# Altium PCB isa_svga.PcbDoc (part 1 of 2)
Units mm, origin at the board's own origin, x right, y up, seen from the top; angles counter-clockwise.
Board outline 104.14 x 87.63 mm, 2 copper layers (Front, Back); 62 components, 153 nets, 436 pads, 95 vias.
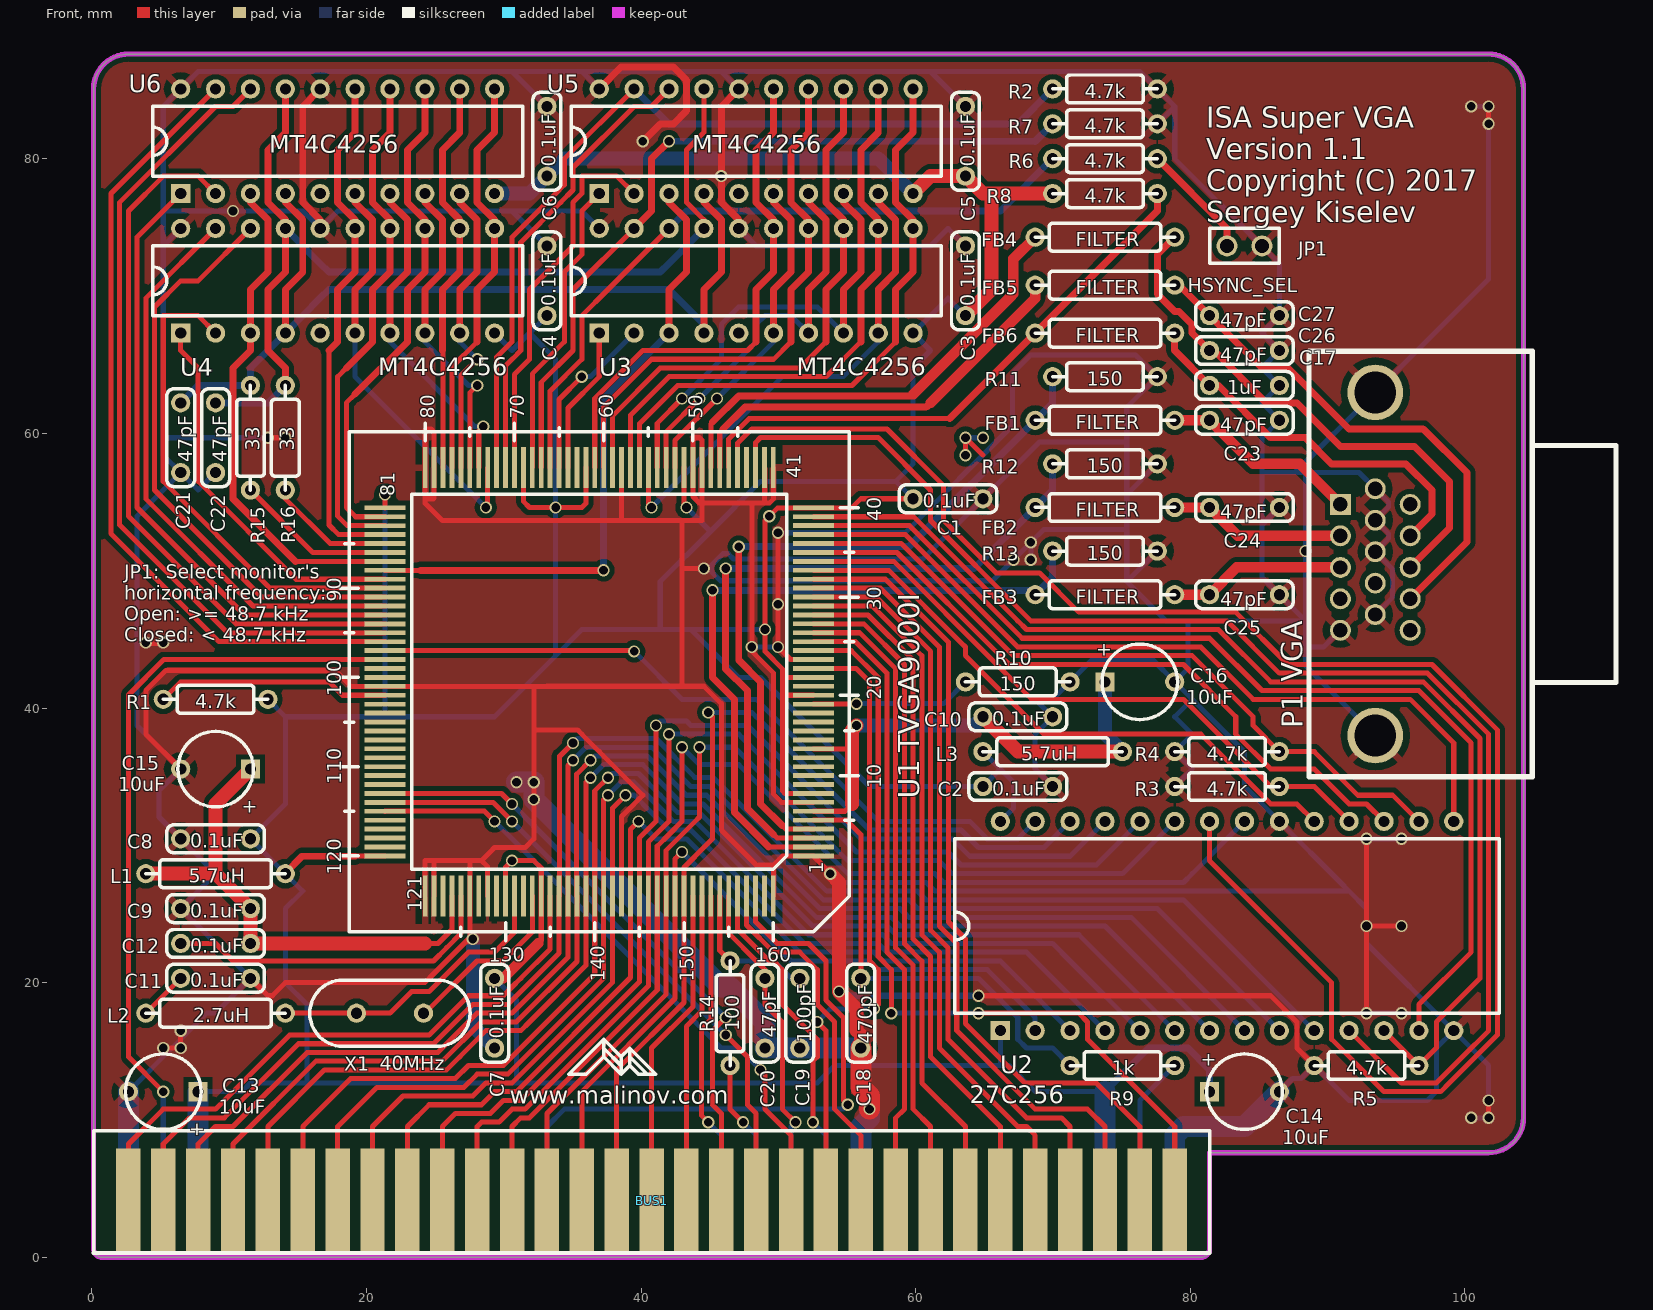
[diagram p0: Front view]
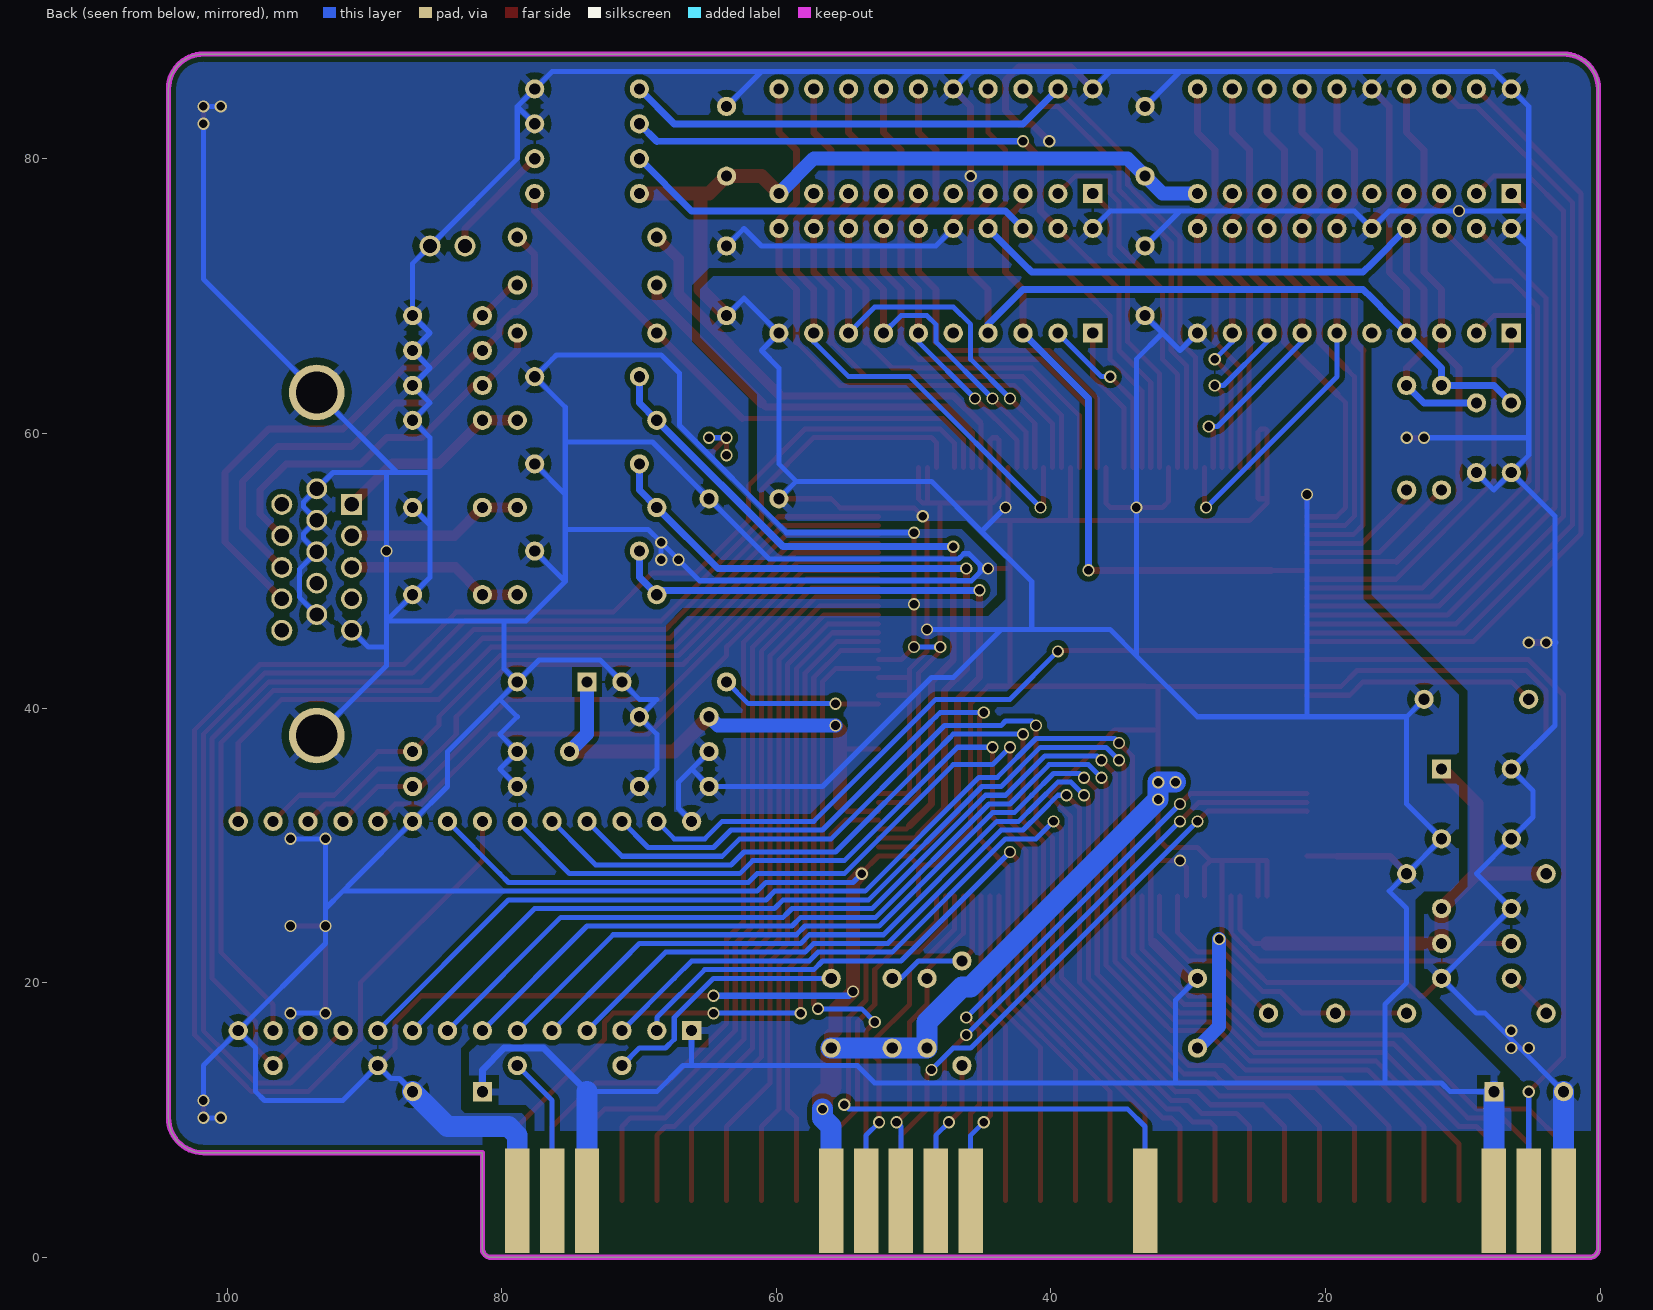
[diagram p1: Back view, seen from below]

## Layer stack, top to bottom
F.Mask: solder mask 0.0102, Solder Resist, Dk 3.5
Front: signal copper 0.0356
Dielectric 1: dielectric 0.32, FR-4, Dk 4.8
Back: signal copper 0.0356
B.Mask: solder mask 0.0102, Solder Resist, Dk 3.5

## Board outline
0.127,0.635 0.127,85.09 cw(c2.667,85.09) 101.727,87.63 cw(c101.727,85.09) 104.267,85.09 104.267,10.16 cw(c101.727,10.16) 101.727,7.62 81.407,7.62 81.407,0.635 cw(c80.772,0.635) 80.772,0 0.762,0 cw(c0.762,0.635) 0.127,0.635

## Design rules (kind name [scope] priority, off if disabled: settings)
Clearance "Clearence 0.37846_Polygon" [InNamedPolygon('Front-GND') OR InNamedPolygon('Back-VCC') OR InNamedPolygon('Back-GND')] p1: gap=0.378 ignorepadtopadclearanceinfootprint=FALSE
Clearance "Clearence 0.254_NetClass" [InNetClass('Default') OR InNetClass('Power')] p2: gap=0.254 ignorepadtopadclearanceinfootprint=FALSE
HoleSize "Hole Size (Default)" [All] p1: absolutevalues=TRUE maxlimit=10 minlimit=0.508 maxpercent=80.000 minpercent=20.000
MinimumSolderMaskSliver [All] p1: minsoldermaskwidth=0
PolygonConnect Polygon_Back-GND_ConnectDirect [IsNamedPolygon('Back-GND') vs IsVia] p1: connectstyle=Direct reliefconductorwidth=0.254 reliefentries=4 polygonreliefangle="90 Angle" airgapwidth=0.254
PolygonConnect Polygon_Back-GND_ConnectRelief45 [IsNamedPolygon('Back-GND') vs (IsThruPin or IsSMTPin) and (PadShape_AllLayers = 'Round')] p2: connectstyle=Relief reliefconductorwidth=0.508 reliefentries=4 polygonreliefangle="45 Angle" airgapwidth=0.508
PolygonConnect Polygon_Back-GND_ConnectRelief90 [IsNamedPolygon('Back-GND') vs (IsThruPin or IsSMTPin) and (PadShape_AllLayers <> 'Round')] p3: connectstyle=Relief reliefconductorwidth=0.508 reliefentries=4 polygonreliefangle="90 Angle" airgapwidth=0.508
PolygonConnect Polygon_Back-VCC_ConnectDirect [IsNamedPolygon('Back-VCC') vs IsVia] p4: connectstyle=Direct reliefconductorwidth=0.254 reliefentries=4 polygonreliefangle="90 Angle" airgapwidth=0.254
PolygonConnect Polygon_Back-VCC_ConnectRelief45 [IsNamedPolygon('Back-VCC') vs (IsThruPin or IsSMTPin) and (PadShape_AllLayers = 'Round')] p5: connectstyle=Relief reliefconductorwidth=0.508 reliefentries=4 polygonreliefangle="45 Angle" airgapwidth=0.508
PolygonConnect Polygon_Back-VCC_ConnectRelief90 [IsNamedPolygon('Back-VCC') vs (IsThruPin or IsSMTPin) and (PadShape_AllLayers <> 'Round')] p6: connectstyle=Relief reliefconductorwidth=0.508 reliefentries=4 polygonreliefangle="90 Angle" airgapwidth=0.508
PolygonConnect Polygon_Front-GND_ConnectDirect [IsNamedPolygon('Front-GND') vs IsVia] p7: connectstyle=Direct reliefconductorwidth=0.254 reliefentries=4 polygonreliefangle="90 Angle" airgapwidth=0.254
PolygonConnect Polygon_Front-GND_ConnectRelief45 [IsNamedPolygon('Front-GND') vs (IsThruPin or IsSMTPin) and (PadShape_AllLayers = 'Round')] p8: connectstyle=Relief reliefconductorwidth=0.508 reliefentries=4 polygonreliefangle="45 Angle" airgapwidth=0.508
PolygonConnect Polygon_Front-GND_ConnectRelief90 [IsNamedPolygon('Front-GND') vs (IsThruPin or IsSMTPin) and (PadShape_AllLayers <> 'Round')] p9: connectstyle=Relief reliefconductorwidth=0.508 reliefentries=4 polygonreliefangle="90 Angle" airgapwidth=0.508
RoutingVias [All] p1: holewidth=0.711 width=1.27 viastyle="Through Hole" minholewidth=0.711 minwidth=1.27 maxholewidth=0.711 maxwidth=1.27
SilkToSilkClearance [All] p1: silktosilkclearance=0
SilkToSolderMaskClearance [IsPad] p1: minsilkscreentomaskgap=0 clearancetoexposedcopper=TRUE
SolderMaskExpansion [All] p1: expansion=0.102 istentingtop=FALSE
Width [All] p1: maxlimit=10 minlimit=0.203 preferedwidth=0.368 minimp=50.000000 maximp=50.000000 favimp=50.000000
26 further rules are at their usual default settings.

## Classes and differential pairs
net class Default: A0 A1 A2 A3 A4 A5 A6 A7 A8 A9 A10 A11 A12 A13 A14 A15 A16 A17 A18 A19 AEN AVDD1 AVDD2 B BLUE C\A\S\ D0 D1 D2 D3 D4 D5 D6 D7 G GND GREEN HSYNC I\O\R\ I\O\W\ IOCHRDY M\E\M\R\ M\E\M\W\ MAA0 MAA1 MAA2 MAA3 MAA4 MAA5 MAA6 MAA7 MAA8 MAB0 MAB1 MAB2 MAB3 MAB4 MAB5 MAB6 MAB7 MAB8 MD0 MD1 MD2 MD3 MD4 MD5 MD6 MD7 MD16 MD17 MD18 MD19 MD20 MD21 MD22 MD23 MONITOR N\M\I\ Net-(C11-Pad1) Net-(C12-Pad2) Net-(C17-Pad1) Net-(C18-Pad1) Net-(C19-Pad1) Net-(C26-Pad1) Net-(C27-Pad1) Net-(JP1-Pad1) Net-(L2-Pad2) Net-(P1-Pad4) Net-(P1-Pad9) Net-(P1-Pad11) Net-(P1-Pad15) Net-(R1-Pad1) Net-(R10-Pad1) Net-(R15-Pad1) Net-(R16-Pad1) Net-(U1-Pad9) Net-(U1-Pad10) Net-(U1-Pad11) Net-(U1-Pad12) Net-(U1-Pad14) Net-(U1-Pad15) Net-(U1-Pad16) Net-(U1-Pad17) Net-(U1-Pad20) Net-(U1-Pad44) Net-(U1-Pad63) Net-(U1-Pad99) Net-(U1-Pad100) Net-(U1-Pad103) Net-(U1-Pad104) Net-(U1-Pad105) Net-(U1-Pad106) Net-(U1-Pad107) Net-(U1-Pad108) Net-(U1-Pad109) Net-(U1-Pad110) Net-(U1-Pad111) Net-(U1-Pad112) Net-(U1-Pad116) Net-(U1-Pad117) Net-(U1-Pad118) Net-(U1-Pad119) Net-(U1-Pad123) Net-(U1-Pad127) Net-(U1-Pad129) Net-(U1-Pad132) Net-(U1-Pad133) Net-(U1-Pad159) Net-(U3-Pad5) Net-(U4-Pad5) Net-(U5-Pad5) Net-(U6-Pad5) OSC R R\A\S\ R\E\F\R\E\S\H\ R\O\M\C\S\ RED RESET RMD0 RMD1 RMD2 RMD3 RMD4 RMD5 RMD6 RMD7 ROMA0 VCC VSYNC W\E\0\ W\E\2\

## Components (designator, comment, footprint, x,y, rotation, side; value= is the part's Value field where it differs from the comment)
BUS1 "BUSPC_DEV" Conn_Bus_ISA8 40.767,4.127 r0 top
C1 "0.1uF" Cap_Cer_504 62.357,55.245 r0 top
C2 "0.1uF" Cap_Cer_504 67.437,34.29 r0 top
C3 "0.1uF" Cap_Cer_504 63.627,71.12 r90 top
C4 "0.1uF" Cap_Cer_504 33.147,71.12 r90 top
C5 "0.1uF" Cap_Cer_504 63.627,81.28 r90 top
C6 "0.1uF" Cap_Cer_504 33.147,81.28 r90 top
C7 "0.1uF" Cap_Cer_504 29.337,17.78 r270 top
C8 "0.1uF" Cap_Cer_504 9.017,30.48 r180 top
C9 "0.1uF" Cap_Cer_504 9.017,25.4 r180 top
C10 "0.1uF" Cap_Cer_504 67.437,39.37 r0 top
C11 "0.1uF" Cap_Cer_504 9.017,20.32 r0 top
C12 "0.1uF" Cap_Cer_504 9.017,22.86 r180 top
C13 "10uF" Cap_Tant_504 5.207,12.065 r180 top
C14 "10uF" Cap_Tant_504 83.947,12.065 r0 top
C15 "10uF" Cap_Tant_504 9.017,35.56 r180 top
C16 "10uF" Cap_Tant_504 76.327,41.91 r0 top
C17 "1uF" Cap_Cer_504 83.947,63.5 r0 top
C18 "470pF" Cap_Cer_504 56.007,17.78 r270 top
C19 "100pF" Cap_Cer_504 51.562,17.78 r270 top
C20 "47pF" Cap_Cer_504 49.022,17.78 r270 top
C21 "47pF" Cap_Cer_504 6.477,59.69 r270 top
C22 "47pF" Cap_Cer_504 9.017,59.69 r270 top
C23 "47pF" Cap_Cer_504 83.947,60.96 r0 top
C24 "47pF" Cap_Cer_504 83.947,54.61 r0 top
C25 "47pF" Cap_Cer_504 83.947,48.26 r0 top
C26 "47pF" Cap_Cer_504 83.947,66.04 r0 top
C27 "47pF" Cap_Cer_504 83.947,68.58 r0 top
FB1 "FILTER" Res_1016 73.787,60.96 r0 top
FB2 "FILTER" Res_1016 73.787,54.61 r0 top
FB3 "FILTER" Res_1016 73.787,48.26 r0 top
FB4 "FILTER" Res_1016 73.787,74.295 r180 top
FB5 "FILTER" Res_1016 73.787,70.802 r180 top
FB6 "FILTER" Res_1016 73.787,67.31 r180 top
JP1 "HSYNC_SEL" Conn_Pin_Header_2x1_Nokey 83.947,73.66 r0 top
L1 "5.7uH" Res_1016 9.017,27.94 r180 top
L2 "2.7uH" Res_1016 9.017,17.78 r0 top
L3 "5.7uH" Res_1016 69.977,36.83 r0 top
P1 "VGA" Conn_Dsub_DE15F 93.472,50.495 r270 top
R1 "4.7k" Res_762 9.017,40.64 r0 top
R2 "4.7k" Res_762 73.787,85.09 r0 top
R3 "4.7k" Res_762 82.677,34.29 r180 top
R4 "4.7k" Res_762 82.677,36.83 r180 top
R5 "4.7k" Res_762 92.837,13.97 r180 top
R6 "4.7k" Res_762 73.787,80.01 r0 top
R7 "4.7k" Res_762 73.787,82.55 r0 top
R8 "4.7k" Res_762 73.787,77.47 r180 top
R9 "1k" Res_762 75.057,13.97 r180 top
R10 "150" Res_762 67.437,41.91 r0 top
R11 "150" Res_762 73.787,64.135 r0 top
R12 "150" Res_762 73.787,57.785 r0 top
R13 "150" Res_762 73.787,51.435 r0 top
R14 "100" Res_762 46.482,17.78 r90 top
R15 "33" Res_762 11.557,59.69 r90 top
R16 "33" Res_762 14.097,59.69 r90 top
U1 "TVGA9000I" PQFP-160 36.957,41.91 r90 top
U2 "27C256" DIP28_600 82.677,24.13 r0 top
U3 "MT4C4256" DIP20_300 48.387,71.12 r0 top
U4 "MT4C4256" DIP20_300 17.907,71.12 r0 top
U5 "MT4C4256" DIP20_300 48.387,81.28 r0 top
U6 "MT4C4256" DIP20_300 17.907,81.28 r0 top
X1 "40MHz" Crystal_HC-49U_Vert 21.717,17.78 r180 top

## Footprints (in the part's own frame and the unit in brackets; to place one, negate y for a bottom-side part, rotate by r counter-clockwise, add the part's x,y. Pads: shape width x height; smd on the part's side, far side on the other; paste and mask are expansions set on the pad)
Cap_Cer_504 [mil]
  round 55 hole 32 paste-55 mask+10: 1(-100,0) 2(100,0)
  silkscreen extent -140,-40 140,40
Cap_Tant_504 [mil]
  rect 55x55 hole 32 paste-55 mask+10: 1(-100,0)
  round 55 hole 32 paste-55 mask+10: 2(100,0)
  silkscreen extent -108,-108 108,108
Conn_Bus_ISA8 [mil]
  rect 70x300 smd far side paste-300 mask+10: 1(1500,0) 2(1400,0) 3(1300,0) 10(600,0) 11(500,0) 12(400,0) 13(300,0) 14(200,0) 19(-300,0) 29(-1300,0) 30(-1400,0) 31(-1500,0)
  rect 70x300 smd paste-300 mask+10: 32(1500,0) 33(1400,0) 34(1300,0) 35(1200,0) 36(1100,0) 37(1000,0) 38(900,0) 39(800,0) 40(700,0) 41(600,0) 42(500,0) 43(400,0) 44(300,0) 45(200,0) 46(100,0) 47(0,0) 48(-100,0) 49(-200,0) 50(-300,0) 51(-400,0) 52(-500,0) 53(-600,0) 54(-700,0) 55(-800,0) 56(-900,0) 57(-1000,0) 58(-1100,0) 59(-1200,0) 60(-1300,0) 61(-1400,0) 62(-1500,0)
  silkscreen extent -1600,-150 1600,200
Conn_Dsub_DE15F [mil]
  rect 60x60 hole 41 paste-60 mask+10: 1(-170.9,-100)
  round 60 hole 41 paste-60 mask+10: 2(-80.7,-100) 3(9.8,-100) 4(100,-100) 5(190.2,-100) 6(-215.6,0) 7(-125.4,0) 8(-35.2,0) 9(54.9,0) 10(145.1,0) 11(-170.9,100) 12(-80.7,100) 13(9.8,100) 14(100,100) 15(190.2,100)
  round 159.4 hole 120.1 paste-159.4 mask+10: Un1(491.9,0) Un2(-491.9,0)
  silkscreen extent -610,-190 610,690
Conn_Pin_Header_2x1_Nokey [mil]
  rrect100% 60x60 hole 40 paste-60 mask+10: 1(-50,0)
  round 60 hole 40 paste-60 mask+10: 2(50,0)
  silkscreen extent -100,-50 100,50
Crystal_HC-49U_Vert [mil]
  round 55 hole 32 paste-55 mask+10: 1(-96.1,0) 2(96.1,0)
  silkscreen extent -230,-95 230,95
DIP20_300 [mil]
  rect 55x55 hole 32 paste-55 mask+10: 1(-450,-150)
  round 55 hole 32 paste-55 mask+10: 2(-350,-150) 3(-250,-150) 4(-150,-150) 5(-50,-150) 6(50,-150) 7(150,-150) 8(250,-150) 9(350,-150) 10(450,-150) 11(450,150) 12(350,150) 13(250,150) 14(150,150) 15(50,150) 16(-50,150) 17(-150,150) 18(-250,150) 19(-350,150) 20(-450,150)
  silkscreen extent -530,-100 530,100
DIP28_600 [mil]
  rect 55x55 hole 32 paste-55 mask+10: 1(-650,-300)
  round 55 hole 32 paste-55 mask+10: 2(-550,-300) 3(-450,-300) 4(-350,-300) 5(-250,-300) 6(-150,-300) 7(-50,-300) 8(50,-300) 9(150,-300) 10(250,-300) 11(350,-300) 12(450,-300) 13(550,-300) 14(650,-300) 15(650,300) 16(550,300) 17(450,300) 18(350,300) 19(250,300) 20(150,300) 21(50,300) 22(-50,300) 23(-150,300) 24(-250,300) 25(-350,300) 26(-450,300) 27(-550,300) 28(-650,300)
  silkscreen extent -780,-250 780,250
PQFP-160 [mil]
  rect 13.8x118.1 smd mask+10: 1(-499,-614.2) 2(-473.4,-614.2) 3(-447.8,-614.2) 4(-422.2,-614.2) 5(-396.6,-614.2) 6(-371,-614.2) 7(-345.4,-614.2) 8(-319.9,-614.2) 9(-294.3,-614.2) 10(-268.7,-614.2) 11(-243.1,-614.2) 12(-217.5,-614.2) 13(-191.9,-614.2) 14(-166.3,-614.2) 15(-140.7,-614.2) 16(-115.1,-614.2) 17(-89.5,-614.2) 18(-63.9,-614.2) 19(-38.4,-614.2) 20(-12.8,-614.2) 21(12.8,-614.2) 22(38.4,-614.2) 23(64,-614.2) 24(89.6,-614.2) 25(115.2,-614.2) 26(140.8,-614.2) 27(166.4,-614.2) 28(192,-614.2) 29(217.5,-614.2) 30(243.1,-614.2) 31(268.7,-614.2) 32(294.3,-614.2) 33(319.9,-614.2) 34(345.5,-614.2) 35(371.1,-614.2) 36(396.7,-614.2) 37(422.3,-614.2) 38(447.9,-614.2) 39(473.5,-614.2) 40(499,-614.2) 81(499,614.2) 82(473.4,614.2) 83(447.8,614.2) 84(422.2,614.2) 85(396.6,614.2) 86(371.1,614.2) 87(345.5,614.2) 88(319.9,614.2) 89(294.3,614.2) 90(268.7,614.2) 91(243.1,614.2) 92(217.5,614.2) 93(191.9,614.2) 94(166.3,614.2) 95(140.7,614.2) 96(115.2,614.2) 97(89.6,614.2) 98(64,614.2) 99(38.4,614.2) 100(12.8,614.2) 101(-12.8,614.2) 102(-38.4,614.2) 103(-64,614.2) 104(-89.6,614.2) 105(-115.2,614.2) 106(-140.8,614.2) 107(-166.3,614.2) 108(-191.9,614.2) 109(-217.5,614.2) 110(-243.1,614.2) 111(-268.7,614.2) 112(-294.3,614.2) 113(-319.9,614.2) 114(-345.5,614.2) 115(-371.1,614.2) 116(-396.7,614.2) 117(-422.2,614.2) 118(-447.8,614.2) 119(-473.4,614.2) 120(-499,614.2)
  rect 118.1x13.8 smd mask+10: 41(614.2,-499) 42(614.2,-473.4) 43(614.2,-447.8) 44(614.2,-422.2) 45(614.2,-396.7) 46(614.2,-371.1) 47(614.2,-345.5) 48(614.2,-319.9) 49(614.2,-294.3) 50(614.2,-268.7) 51(614.2,-243.1) 52(614.2,-217.5) 53(614.2,-191.9) 54(614.2,-166.3) 55(614.2,-140.8) 56(614.2,-115.2) 57(614.2,-89.6) 58(614.2,-64) 59(614.2,-38.4) 60(614.2,-12.8) 61(614.2,12.8) 62(614.2,38.4) 63(614.2,64) 64(614.2,89.6) 65(614.2,115.2) 66(614.2,140.8) 67(614.2,166.3) 68(614.2,191.9) 69(614.2,217.5) 70(614.2,243.1) 71(614.2,268.7) 72(614.2,294.3) 73(614.2,319.9) 74(614.2,345.5) 75(614.2,371.1) 76(614.2,396.7) 77(614.2,422.2) 78(614.2,447.8) 79(614.2,473.4) 80(614.2,499) 121(-614.2,499) 122(-614.2,473.4) 123(-614.2,447.8) 124(-614.2,422.2) 125(-614.2,396.7) 126(-614.2,371.1) 127(-614.2,345.5) 128(-614.2,319.9) 129(-614.2,294.3) 130(-614.2,268.7) 131(-614.2,243.1) 132(-614.2,217.5) 133(-614.2,191.9) 134(-614.2,166.3) 135(-614.2,140.8) 136(-614.2,115.2) 137(-614.2,89.6) 138(-614.2,64) 139(-614.2,38.4) 140(-614.2,12.8) 141(-614.2,-12.8) 142(-614.2,-38.4) 143(-614.2,-64) 144(-614.2,-89.6) 145(-614.2,-115.2) 146(-614.2,-140.7) 147(-614.2,-166.3) 148(-614.2,-191.9) 149(-614.2,-217.5) 150(-614.2,-243.1) 151(-614.2,-268.7) 152(-614.2,-294.3) 153(-614.2,-319.9) 154(-614.2,-345.5) 155(-614.2,-371.1) 156(-614.2,-396.6) 157(-614.2,-422.2) 158(-614.2,-447.8) 159(-614.2,-473.4) 160(-614.2,-499)
  silkscreen extent -742,-742 742,742
Res_762 [mil]
  round 55 hole 32 paste-55 mask+10: 1(-150,0) 2(150,0)
  silkscreen extent -150,-40 150,40
Res_1016 [mil]
  round 55 hole 32 paste-55 mask+10: 1(-200,0) 2(200,0)
  silkscreen extent -200,-40 200,40

## Part data
BUS1: library part Conn_Bus_ISA8, "ISA8 PCB edge connector"
C1 C2 C3 C4 C5 C6 C7 C8 C9 C10 C11 C12 C17 C18 C19 C20 C21 C22 C23 C24 C25 C26 C27: library part Cap_Cer_504, "Ceramic Capacitor 5.04mm"
C13 C14 C15 C16: library part Cap_Tant_504, "Tantalum Capacitor - 5.04mm"
FB1 FB2 FB3 FB4 FB5 FB6 L1 L2 L3: library part Res_1016, "Resistor 10.16mm between leads"
JP1: library part Conn_Pin_Header_2x1_Nokey, "Connector Pin Header 2x1 No Key"
P1: library part Conn_Dsub_DE15F, "Connector DE15 Female Right Angle Through Hole"
R1 R2 R3 R4 R5 R6 R7 R8 R9 R10 R11 R12 R13 R14 R15 R16: library part Res_762, "Resitance 3 pas"
U1: library part PQFP-160
U2: library part DIP28_600, "Module Dil 28 pins, pads ronds, e=600 mils"
U3 U4 U5 U6: library part DIP20_300, "20 pins DIL package, round pads"
X1: library part Crystal_HC-49U_Vert, "Quartz Crystal HC-49U Vertical"

## Via types
v1: diameter 0.889, hole 0.635, Front to Back, tented both sides, 95 vias

## Nets (pads, with @x,y where several pads share a name; then routed paths per layer and width w, separated by ;. In a path a pad name is that pad's centre, name@x,y a point inside that pad or via, vN(x,y) a via of type N, cw(c..) or ccw(c..) an arc to the next point about the centre after c; other vN are vias at no path point)
A0: BUS1.62 U1.135 | length 44.6
  Front w0.368: BUS1.62@2.667,4.127 2.667,8.255 5.207,10.795 9.017,10.795 14.414,16.192 23.939,16.192 24.575,16.192 27.432,19.05 29.972,19.05 30.607,19.685 31.242,20.32 33.381,22.459 33.381,24.447 U1.135@33.381,26.309
A1: BUS1.61 U1.136 U2.10 | length 120.2
  Front w0.368: BUS1.61@5.207,4.127 5.207,8.255 7.112,10.16 9.652,10.16 15.05,15.557 24.257,15.557 24.892,15.557 27.749,18.415 29.972,18.415 29.972,18.42 30.295,18.42 31.242,19.367 31.877,20.002 34.031,22.156 U1.136@34.031,26.309 ; 34.031,23.49 34.031,23.495 U1.136@34.031,26.309 ; v1(35.052,37.465) 34.099,36.512 34.051,36.512 34.051,34.242 34.051,26.309 U1.136@34.031,26.309
  Back w0.368: v1(35.052,37.465) 35.369,37.782 41.084,37.782 43.912,34.955 45.245,34.955 53.53,26.67 53.721,26.67 59.187,26.67 ; U2.10@89.027,16.51 79.502,26.035 60.759,26.035 60.759,26.03 60.134,26.655 60.134,26.665 60.134,26.67 59.187,26.67 ; 59.187,26.67 59.187,26.675 59.187,26.67
A2: BUS1.60 U1.137 U2.9 | length 111.9
  Front w0.368: BUS1.60@7.747,4.127 7.747,8.255 9.017,9.525 10.287,9.525 15.684,14.922 23.939,14.922 25.204,14.922 28.062,17.78 ; v1(35.052,36.195) 34.681,35.824 34.681,35.242 34.681,33.919 U1.137@34.681,26.309 34.681,24.447 34.681,21.854 30.607,17.78 28.062,17.78 ; 28.062,17.78 28.062,17.785 28.062,17.78
  Back w0.368: v1(35.052,36.195) 35.999,37.142 40.767,37.142 40.772,37.142 43.624,34.29 45.021,34.29 53.276,26.035 58.547,26.035 ; 77.607,25.395 77.602,25.4 77.597,25.4 ; U2.9@86.487,16.51 86.487,16.515 77.597,25.405 77.597,25.4 ; 58.547,26.035 58.864,26.035 ; 58.547,26.035 59.499,26.035 60.134,25.4 77.597,25.4 ; 58.864,26.035 58.864,26.03 58.864,26.035
A3: BUS1.59 U1.138 U2.8 | length 105.8
  Front w0.368: BUS1.59@10.287,4.127 10.287,8.255 10.287,8.26 16.317,14.29 25.53,14.29 28.384,17.145 29.019,17.145 29.019,17.15 30.93,17.15 35.331,21.552 35.331,21.907 35.331,22.86 U1.138@35.331,26.309 35.311,26.309 35.311,33.597 35.311,34.608 35.311,35.184 v1(36.322,36.195)
  Back w0.368: v1(36.322,36.195) 36.639,36.512 40.45,36.512 43.307,33.655 44.767,33.655 44.831,33.591 53.023,25.4 58.547,25.4 58.864,25.4 59.182,25.082 59.499,24.765 75.692,24.765 U2.8@83.947,16.51
A4: BUS1.58 U1.139 U2.7 | length 100.7
  Front w0.368: BUS1.58@12.827,4.127 12.827,9.525 16.954,13.652 25.845,13.652 26.797,14.605 28.702,16.51 31.242,16.51 31.877,17.145 35.982,21.25 35.982,21.907 U1.139@35.982,26.309 36.002,26.309 36.002,33.02 36.002,33.972 36.002,34.605 v1(36.322,34.925)
  Back w0.368: v1(36.322,34.925) 37.274,35.877 40.132,35.877 41.719,34.29 42.989,33.02 44.514,33.02 52.768,24.765 58.229,24.765 58.229,24.76 58.859,24.13 73.787,24.13 U2.7@81.407,16.51
A5: BUS1.57 U1.140 U2.6 | length 95.1
  Front w0.368: BUS1.57@15.367,4.127 15.367,9.525 18.86,13.018 26.479,13.018 27.432,13.97 29.972,13.97 36.632,20.63 36.632,22.225 U1.140@36.632,26.309 36.632,32.385 36.632,33.972 36.639,33.972 v1(37.592,34.925)
  Back w0.368: v1(37.592,34.925) 37.91,35.242 39.814,35.242 41.402,33.655 42.672,32.385 44.259,32.385 52.514,24.13 53.149,24.13 57.912,24.13 58.547,23.495 71.882,23.495 U2.6@78.867,16.51
A6: BUS1.56 U1.141 U2.5 | length 90
  Front w0.368: BUS1.56@17.907,4.127 17.907,9.525 20.764,12.383 27.114,12.383 28.067,13.335 28.067,13.34 30.295,13.34 37.282,20.328 U1.141@37.282,26.309 37.282,31.75 ; 37.282,32.393 37.282,32.385 37.282,31.75 ; v1(37.592,33.655) 37.282,33.345 37.282,33.337 37.282,31.75
  Back w0.368: v1(37.592,33.655) 38.544,34.608 39.497,34.608 41.084,33.02 42.355,31.75 43.942,31.75 52.197,23.495 52.832,23.495 53.467,23.495 57.594,23.495 58.229,22.86 69.977,22.86 71.247,21.59 U2.5@76.327,16.51
A7: BUS1.55 U1.142 U2.4 | length 83.3
  Front w0.368: BUS1.55@20.447,4.127 20.447,9.525 22.669,11.747 27.749,11.747 28.702,12.7 28.702,12.71 30.617,12.71 37.932,20.025 37.932,20.637 37.932,21.273 U1.142@37.932,26.309 37.932,31.75 37.932,32.067 ; 37.932,32.09 37.932,32.067 ; 37.932,32.408 37.932,32.385 ; v1(38.862,33.655) 37.932,32.725 37.932,32.385 ; 37.932,32.067 37.932,32.385
  Back w0.368: v1(38.862,33.655) 39.497,33.655 40.767,32.385 42.037,31.115 43.624,31.115 51.88,22.86 52.514,22.86 52.832,22.86 57.277,22.86 57.277,22.855 57.907,22.225 68.072,22.225 69.342,20.955 U2.4@73.787,16.51
A8: BUS1.54 U1.144 U2.3 | length 75.5
  Front w0.368: BUS1.54@22.987,4.127 22.987,9.525 24.575,11.112 28.384,11.112 29.337,12.065 30.924,12.065 ; v1(39.814,31.75) 39.233,31.168 39.233,29.21 U1.144@39.233,26.309 39.233,20.955 39.233,20.373 30.924,12.065 ; 30.924,12.065 30.924,12.06 30.924,12.065
  Back w0.368: v1(39.814,31.75) 41.084,30.48 43.307,30.48 51.562,22.225 52.197,22.225 56.959,22.225 57.594,21.59 66.167,21.59 67.437,20.32 U2.3@71.247,16.51
A9: BUS1.53 U1.145 U2.25 | length 81.2
  Front w0.368: BUS1.53@25.527,4.127 25.527,9.525 26.479,10.477 29.019,10.477 29.972,11.43 31.242,11.43 39.814,20.002 39.883,20.071 U1.145@39.883,26.309 39.883,28.892 39.883,30.549 41.084,31.75 41.084,38.1 41.084,38.417 v1(41.084,38.735)
  Back w0.368: v1(41.084,38.735) 41.402,39.052 43.307,39.052 43.624,38.735 47.752,38.735 48.704,37.782 56.007,30.48 62.674,30.48 63.944,29.21 71.247,29.21 71.882,29.845 U2.25@73.787,31.75
A10: BUS1.52 U1.146 U2.24 | length 80.6
  Front w0.368: BUS1.52@28.067,4.127 28.067,9.525 28.384,9.842 29.654,9.842 30.612,10.8 31.565,10.8 40.531,19.766 40.531,20.002 U1.146@40.531,26.309 40.531,29.845 40.531,30.244 42.037,31.75 42.037,37.465 v1(42.037,38.1)
  Back w0.368: v1(42.037,38.1) 47.117,38.1 47.434,37.782 48.387,36.83 55.689,29.527 62.357,29.527 63.309,28.575 73.152,28.575 73.787,29.21 U2.24@76.327,31.75
A11: BUS1.51 U1.147 U2.21 | length 85.4
  Front w0.368: BUS1.51@30.607,4.127 30.607,9.525 31.242,10.16 31.877,10.16 41.181,19.464 41.181,20.32 41.181,20.637 U1.147@41.181,26.309 41.181,29.845 41.181,29.942 42.037,30.797 42.989,31.75 v1(42.989,37.148)
  Back w0.368: v1(42.989,37.148) 44.259,35.877 47.117,35.877 55.054,27.94 59.817,27.94 61.404,27.94 62.039,27.305 79.502,27.305 80.137,27.94 U2.21@83.947,31.75
A12: BUS1.50 U1.148 U2.23 | length 77.6
  Front w0.368: BUS1.50@33.147,4.127 33.147,8.89 33.147,10.477 41.831,19.162 41.831,21.273 U1.148@41.831,26.309 41.831,28.575 41.831,29.21 41.831,29.639 42.672,30.48 43.942,31.75 44.259,32.067 v1(44.259,37.148)
  Back w0.368: v1(44.259,37.148) 46.799,37.148 55.054,28.892 61.722,28.892 62.674,27.94 62.992,27.94 75.057,27.94 U2.23@78.867,31.75
A13: BUS1.49 U1.149 U2.2 | length 60.1
  Front w0.368: BUS1.49@35.687,4.127 35.687,9.525 35.687,12.065 42.481,18.86 42.481,20.32 U1.149@42.481,26.309 42.481,29.019 42.672,29.21 v1(42.989,29.527)
  Back w0.368: v1(42.989,29.527) 50.927,21.59 56.642,21.59 57.277,20.955 65.215,20.955 68.707,17.462 U2.2@68.707,16.51
A14: BUS1.48 U1.150 U2.26 | length 69.8
  Front w0.368: BUS1.48@38.227,4.127 38.227,9.525 38.227,10.795 38.227,13.652 43.132,18.557 43.132,19.367 U1.150@43.132,26.309 43.132,28.4 43.307,28.575 44.577,29.845 45.212,30.48 45.212,39.37 v1(44.895,39.688)
  Back w0.368: v1(44.895,39.688) 48.069,39.688 48.387,39.37 49.022,38.735 56.642,31.115 63.309,31.115 64.579,29.845 69.342,29.845 U2.26@71.247,31.75
A15: BUS1.47 U1.151 | length 23.4
  Front w0.368: BUS1.47@40.767,4.127 40.767,15.24 43.782,18.255 43.782,20.637 U1.151@43.782,26.309
A16: BUS1.46 U1.152 | length 22.6
  Front w0.368: BUS1.46@43.307,4.127 43.307,9.525 43.307,10.16 43.307,13.335 43.307,16.828 44.432,17.953 U1.152@44.432,26.309
A17: BUS1.45 U1.113 | length 45.6
  Front w0.368: U1.113@21.356,33.785 29.842,33.785 v1(30.607,33.02) ; BUS1.45@45.847,4.127 45.847,10.477 45.212,11.112 45.212,16.51 v1(46.164,17.462)
  Back w0.368: v1(30.607,33.02) v1(46.164,17.462)
A18: BUS1.44 U1.114 | length 44.8
  Front w0.368: U1.114@21.356,33.134 29.223,33.134 v1(30.607,31.75) ; v1(46.164,16.192) 47.752,14.605 47.752,11.112 48.387,10.477 BUS1.44@48.387,4.127
  Back w0.368: v1(30.607,31.75) v1(46.164,16.192)
A19: BUS1.43 U1.115 | length 47
  Front w0.368: v1(29.337,31.75) 28.583,32.504 U1.115@21.356,32.504 ; v1(48.704,13.652) 49.022,13.335 49.022,10.795 50.927,8.89 BUS1.43@50.927,4.127 ; U1.115@21.356,32.504 U1.115@21.356,32.484 U1.115@21.356,32.504
  Back w0.368: v1(29.337,31.75) 45.847,15.24 47.117,15.24 ; 48.069,14.287 47.117,15.24 ; v1(48.704,13.652) 47.117,15.24
AEN: BUS1.42 U1.22 | length 46.8
  Front w0.368: U1.22@52.558,42.885 54.419,42.885 ; v1(52.832,17.145) 53.467,16.51 53.467,16.192 BUS1.42@53.467,4.127 ; 54.714,42.885 54.419,42.885 ; v1(56.959,18.098) 57.277,18.415 57.277,20.955 56.642,21.59 56.642,41.91 55.667,42.885 54.737,42.885 54.419,42.885
  Back w0.368: v1(52.832,17.145) 53.785,18.098 v1(56.959,18.098)
AVDD1: C9.1 C12.1 C15.1 L1.2 U1.124 | length 48.6
  Front w0.368: L1.2@3.937,27.94 9.017,27.94 ; 9.017,33.02 C15.1@11.557,35.56 ; C12.1@11.557,22.86 C9.1@11.557,25.4 ; 24.257,22.86 25.209,22.86 26.233,23.884 U1.124@26.233,26.309
  Front w1.016: L1.2@3.937,27.94 9.017,27.94 ; C15.1@11.557,35.56 9.017,33.02 9.017,27.94 ; 24.257,22.86 C12.1@11.557,22.86 C9.1@11.557,25.4 9.017,27.94
AVDD2: C10.1 C16.1 L3.2 U1.6 U1.13 | length 45.5
  Front w0.368: U1.6@52.558,32.487 54.839,32.487 55.372,33.02 55.372,33.655 55.372,33.972 ; U1.13@52.558,37.036 55.26,37.036 55.372,37.148 ; 55.372,34.29 55.372,33.972 ; 55.372,38.417 55.372,37.148 ; 55.372,33.972 55.372,37.148
  Front w1.016: 55.372,33.02 55.372,38.417 v1(55.689,38.735) ; C10.1@64.897,39.37 67.437,36.83 L3.2@75.057,36.83
  Back w0.368: 73.787,38.1 L3.2@75.057,36.83
  Back w1.016: v1(55.689,38.735) 64.262,38.735 C10.1@64.897,39.37 ; C16.1@73.787,41.91 73.787,38.1 L3.2@75.057,36.83
B: FB3.1 R13.1 U1.2 | length 51
  Front w0.368: 49.299,29.886 50.292,29.886 U1.2@52.558,29.886
  Front w0.505: 45.212,42.227 v1(45.212,48.578)
  Front w0.508: 45.212,42.227 46.799,40.64 46.799,33.337 46.799,32.385 49.299,29.886
  Back w0.508: v1(45.212,48.578) 68.389,48.578 FB3.1@68.707,48.26 69.977,49.53 R13.1@69.977,51.435
BLUE: C25.1 FB3.2 P1.3 | length 12.9
  Front w0.762: FB3.2@78.867,48.26 C25.1@81.407,48.26 83.393,50.246 P1.3@90.932,50.246
C\A\S\: C22.1 R16.2 U3.17 U4.17 U5.17 U6.17 | length 73.6
  Front w0.368: U4.17@14.097,74.93 U4.17@14.097,75.565 ; U3.17@44.577,74.93 44.577,75.565 43.307,76.835 43.307,80.645 44.577,81.915 U5.17@44.577,85.09
  Front w0.505: R16.2@14.097,63.5 14.097,64.77 12.827,66.04 12.827,70.485 14.097,71.755 U4.17@14.097,74.93 ; U4.17@14.097,75.565 12.827,76.835 12.827,80.645 14.097,81.915 U6.17@14.097,85.09
  Back w0.505: C22.1@9.017,62.23 12.827,62.23 R16.2@14.097,63.5 ; U4.17@14.097,74.93 16.637,72.39 17.272,71.755 41.402,71.755 42.037,72.39 U3.17@44.577,74.93
D0: BUS1.40 U1.25 | length 45.5
  Front w0.368: U1.25@52.558,44.836 55.621,44.836 57.912,42.545 57.912,22.225 59.182,20.955 59.182,10.795 58.547,10.16 BUS1.40@58.547,4.127
D1: BUS1.39 U1.26 | length 46.9
  Front w0.368: U1.26@52.558,45.486 54.737,45.486 55.923,45.486 58.547,42.862 58.547,22.543 59.817,21.273 59.817,10.795 61.087,9.525 BUS1.39@61.087,4.127
D2: BUS1.38 U1.27 | length 53.2
  Front w0.368: U1.27@52.558,46.137 55.054,46.137 56.225,46.137 59.182,43.18 59.182,22.835 60.452,21.565 60.452,12.7 63.627,9.525 ; BUS1.38@63.627,4.127 63.627,9.525 ; 60.452,12.695 60.447,12.695 60.452,12.695 ; 60.452,12.695 63.622,9.525 63.627,9.525
D3: BUS1.37 U1.28 | length 50.6
  Front w0.368: U1.28@52.558,46.787 55.054,46.787 56.528,46.787 59.817,43.497 59.817,23.177 61.087,21.907 61.087,14.605 ; BUS1.37@66.167,4.127 66.167,8.89 66.167,9.525 61.082,14.61 ; 61.082,14.61 61.087,14.605 ; 61.082,14.61 61.087,14.605
D4: BUS1.36 U1.29 | length 52.9
  Front w0.368: U1.29@52.558,47.434 54.737,47.434 56.832,47.434 60.452,43.815 60.452,23.495 61.722,22.225 61.722,15.24 67.437,9.525 68.072,9.525 68.707,8.89 BUS1.36@68.707,4.127
D5: BUS1.35 U1.30 | length 55.9
  Front w0.368: U1.30@52.558,48.085 55.372,48.085 57.14,48.085 61.09,44.135 61.09,23.812 62.357,22.545 62.357,15.875 68.072,10.16 70.617,10.16 71.247,9.53 BUS1.35@71.247,4.127
D6: BUS1.34 U1.31 | length 58.5
  Front w0.368: U1.31@52.558,48.735 56.007,48.735 57.437,48.735 61.722,44.45 61.722,24.13 62.992,22.86 62.992,16.51 ; BUS1.34@73.787,4.127 73.787,9.525 72.517,10.795 68.707,10.795 62.987,16.515 ; 62.987,16.515 62.992,16.51 ; 62.987,16.515 62.992,16.51
D7: BUS1.33 U1.32 | length 66.6
  Front w0.368: U1.32@52.558,49.385 56.642,49.385 57.803,49.385 62.389,44.799 62.389,24.416 63.627,23.177 63.627,17.018 67.945,12.7 68.072,12.7 73.152,12.7 76.327,9.525 ; 76.327,9.525 BUS1.33@76.327,4.127 76.327,9.525
G: FB2.1 R12.1 U1.3 | length 51.9
  Front w0.368: 49.657,30.797 49.919,30.536 U1.3@52.558,30.536
  Front w0.505: 46.164,42.862 v1(46.164,50.165)
  Front w0.508: 46.164,42.862 47.752,41.275 47.752,33.02 47.752,32.703 49.657,30.797
  Back w0.508: v1(46.164,50.165) 64.262,50.165 FB2.1@68.707,54.61 69.977,55.88 R12.1@69.977,57.785